# Altium PCB PCB_DuasRodas.PcbDoc
Units mm, origin at the board's own origin, x right, y up, seen from the top; angles counter-clockwise.
Board outline 65 x 65 mm, 2 copper layers (Top Layer, Bottom Layer); 23 components, 35 nets, 133 pads, 6 vias.
Unrouted connection lines stored in the file: 29.
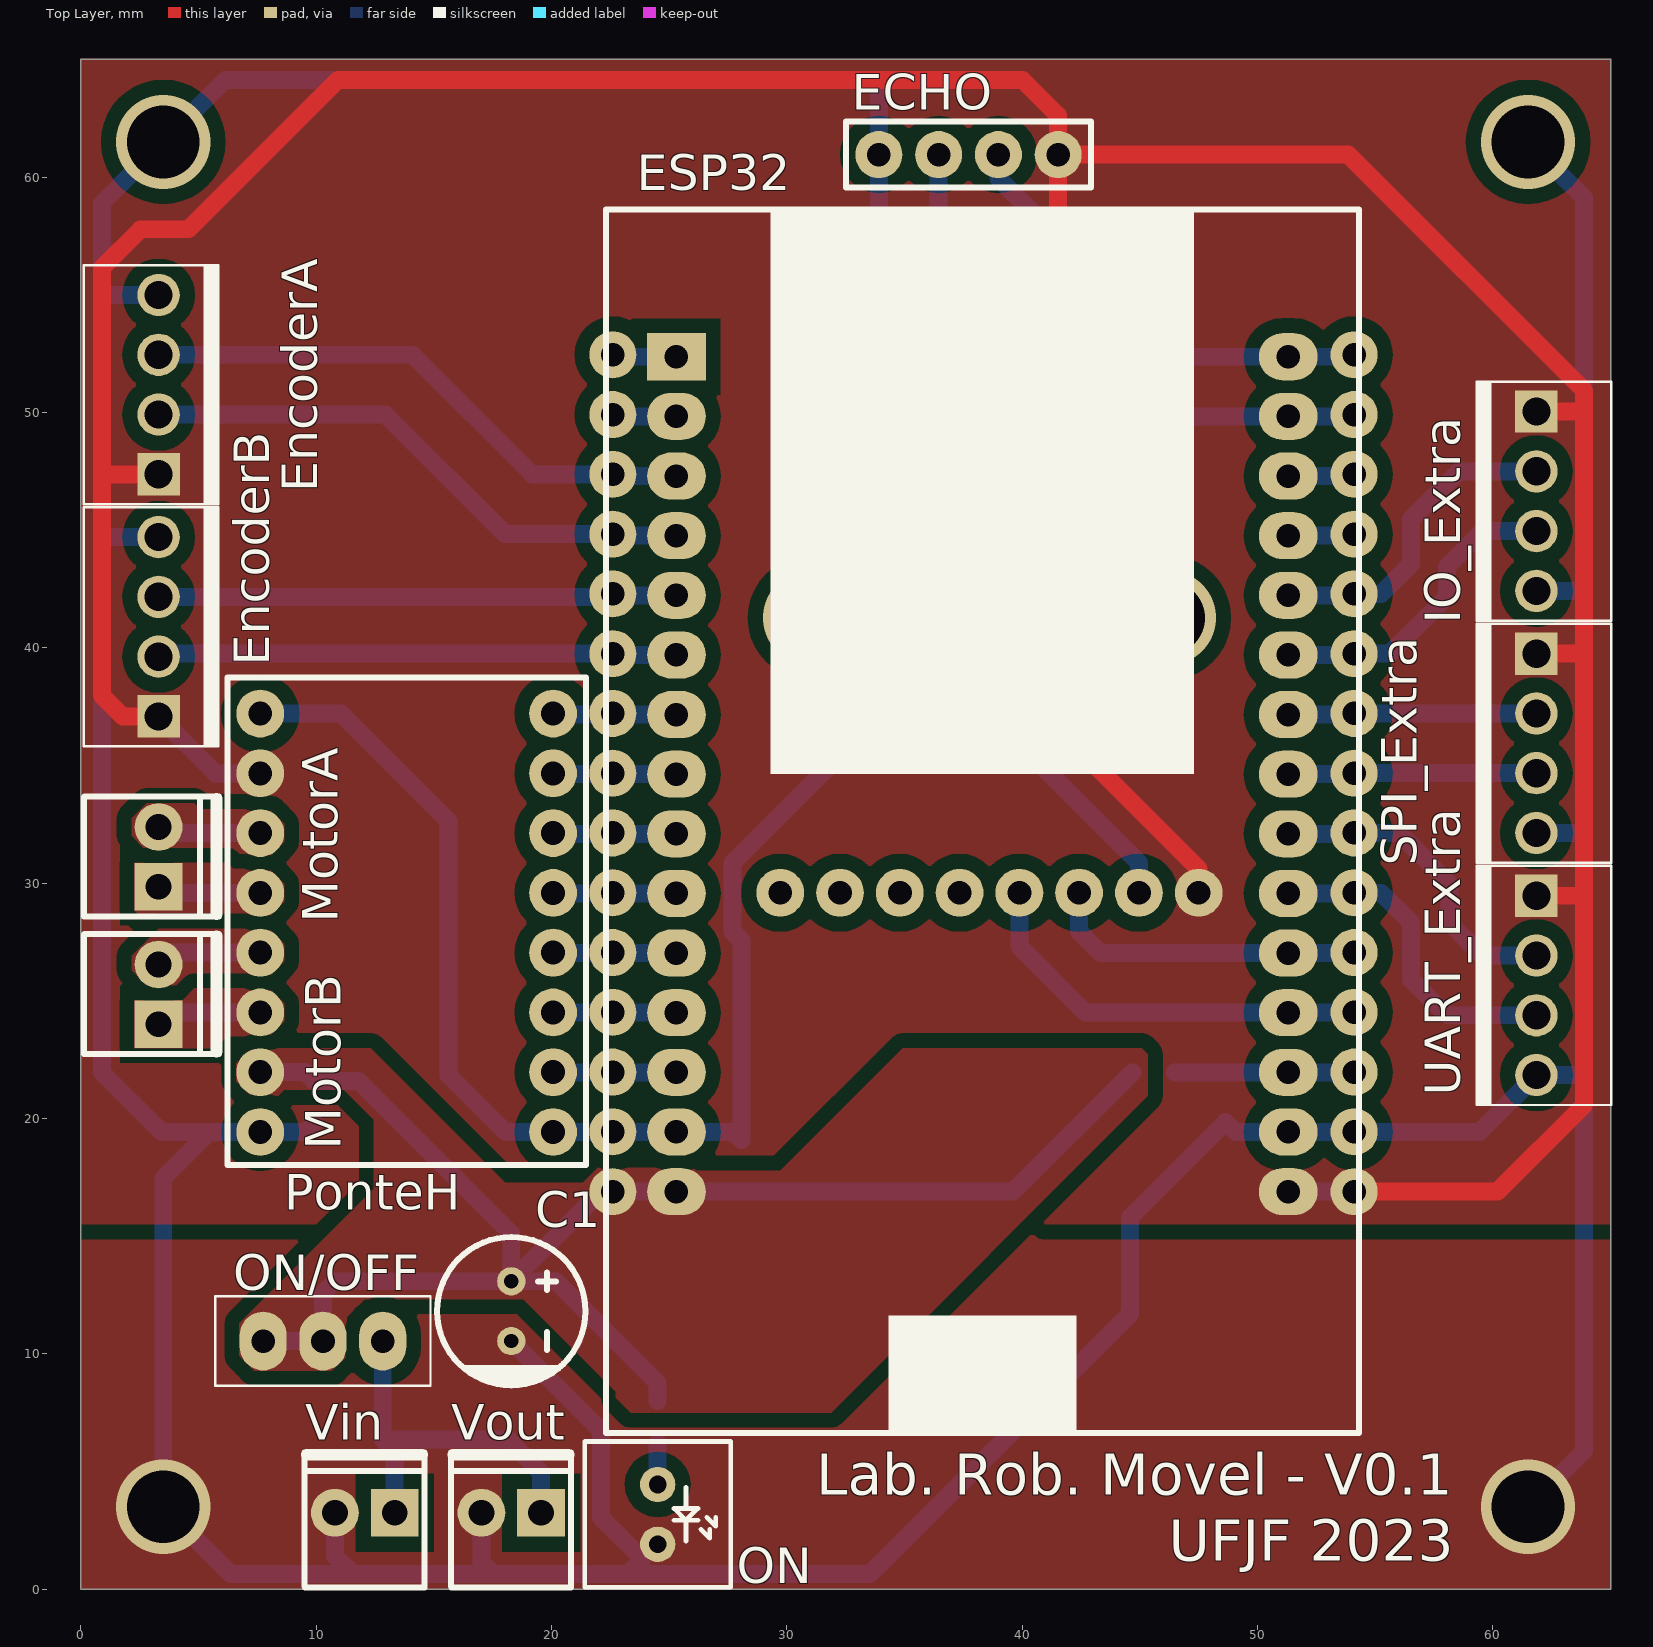
[diagram p0: Top Layer view]
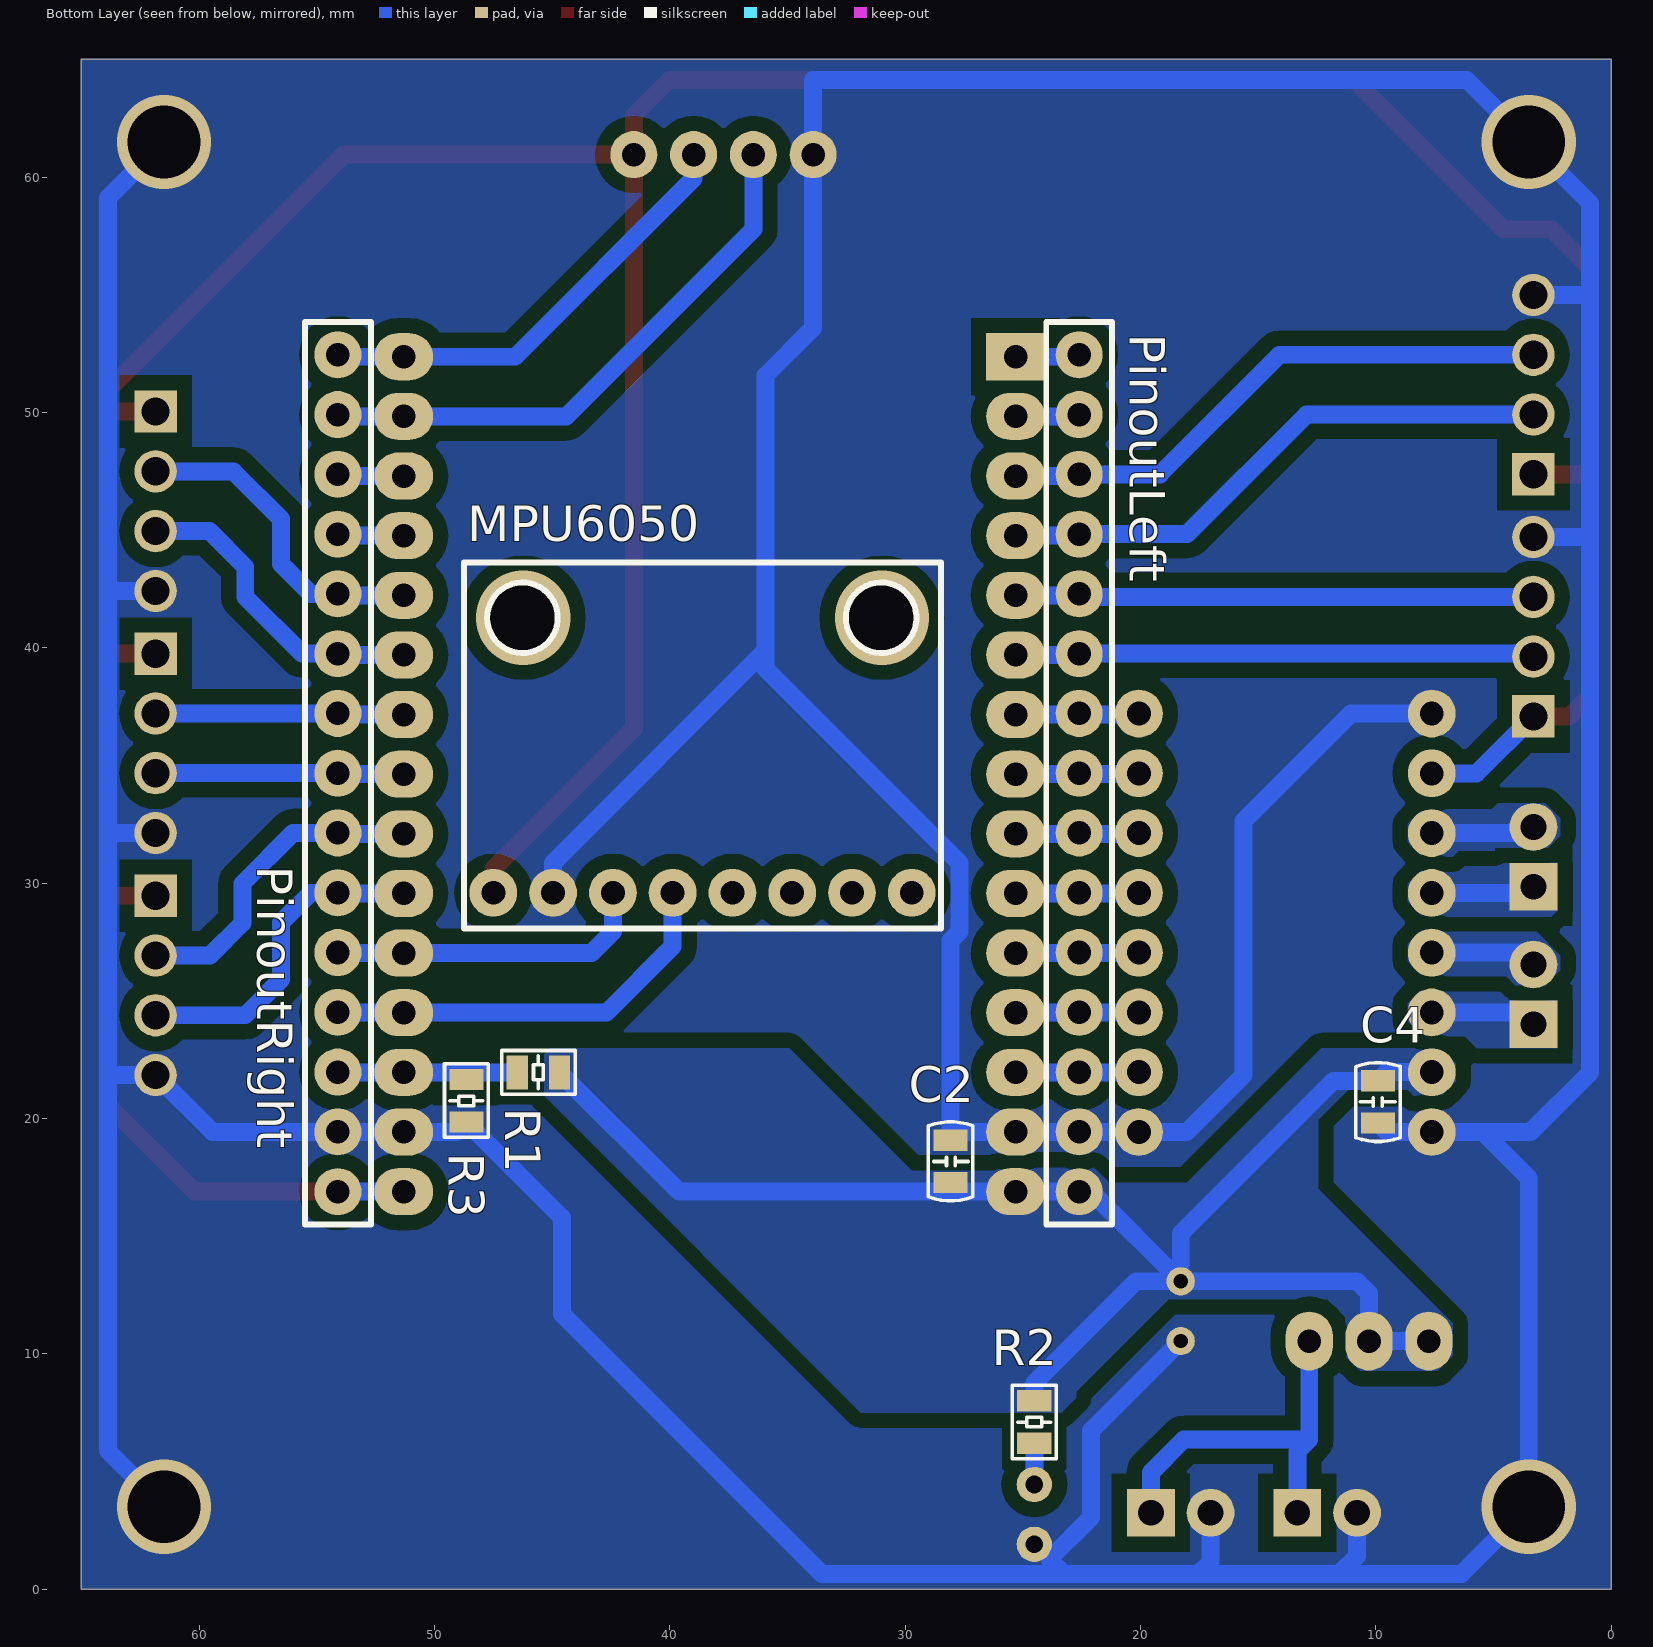
[diagram p1: Bottom Layer view, seen from below]
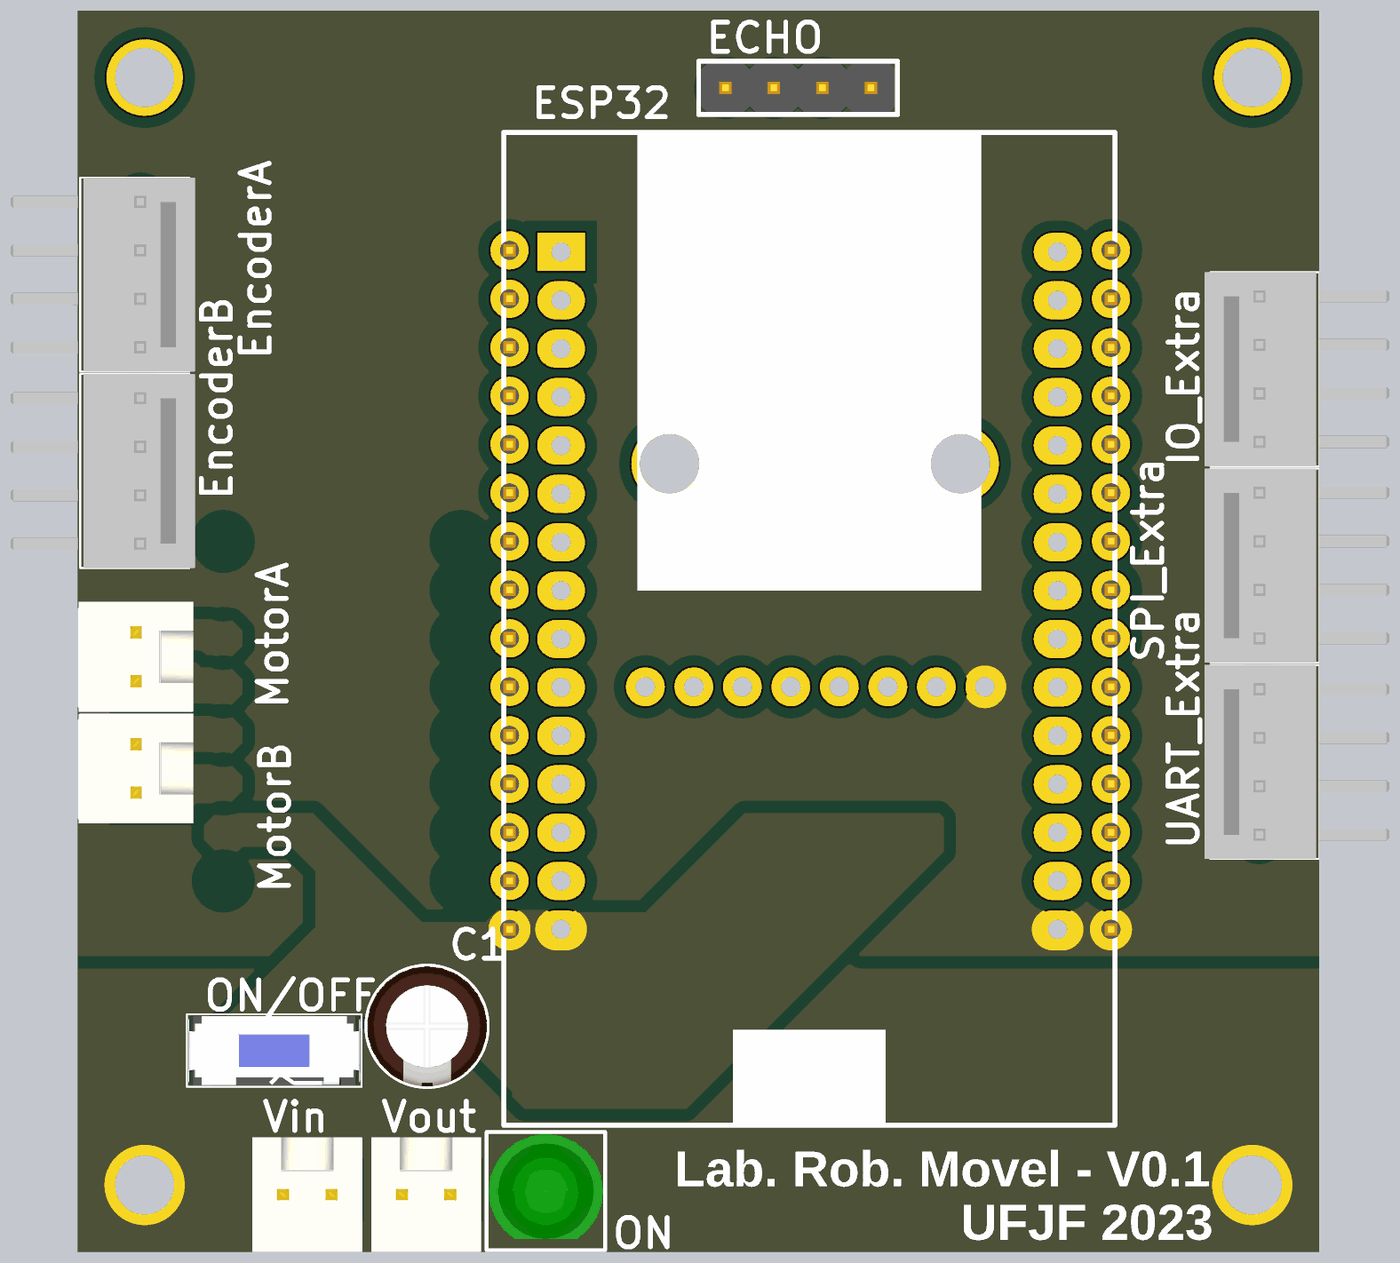
[diagram p2: 3D render of the assembled board from above, using the file's embedded part models]
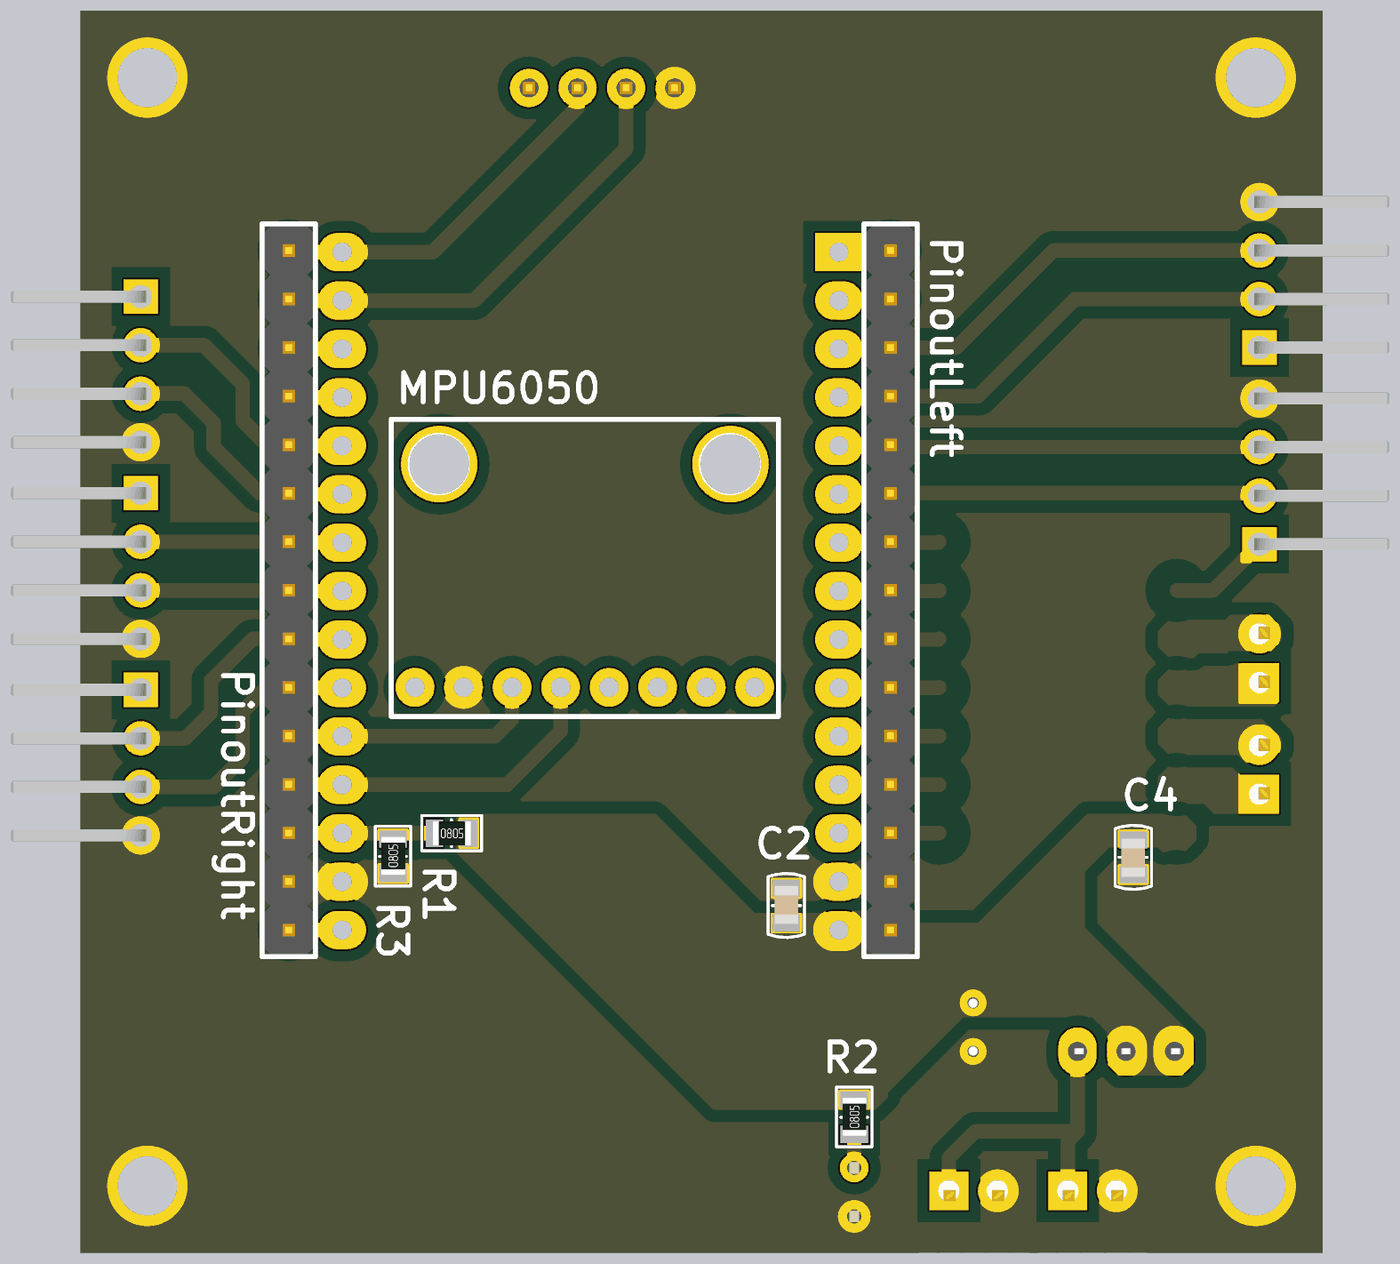
[diagram p3: 3D render of the assembled board from below, using the file's embedded part models]

## Layer stack, top to bottom
Top Solder: solder mask 0.0102, Solder Resist, Dk 3.5
Top Layer: signal copper 0.0356
Dielectric 1: dielectric 0.32, FR-4, Dk 4.8
Bottom Layer: signal copper 0.0356
Bottom Solder: solder mask 0.0102, Solder Resist, Dk 3.5

## Board outline
0,0 65,0 65,65 0,65

## Design rules (kind name [scope] priority, off if disabled: settings)
Clearance [All] p1: gap=0.381 ignorepadtopadclearanceinfootprint=FALSE except(0: Arc-Hole Track-Hole SMDPad-Hole THPad-Hole Via-Hole Fill-Hole Region-Hole Text-Hole; 0.635: Arc-Poly Track-Poly SMDPad-Poly THPad-Poly Via-Poly Fill-Poly Poly-Poly Poly-Region Poly-Text Poly-Hole)
ComponentClearance [All] p1: gap=0 collisioncheckmode=3 verticalgap=0 showdistances=TRUE
HoleSize [All] p1: absolutevalues=TRUE maxlimit=10 minlimit=0.025 maxpercent=80.000 minpercent=20.000
HoleToHoleClearance [All] p1: gap=0.01 allowstackedmicrovias=TRUE
MinimumSolderMaskSliver [All] p1: minsoldermaskwidth=0.01
PolygonConnect [All] p1: connectstyle=Direct reliefconductorwidth=0.762 reliefentries=4 polygonreliefangle="90 Angle" airgapwidth=0.381
RoutingVias [All] p1: holewidth=0.711 width=1.27 viastyle="Through Hole" minholewidth=0.711 minwidth=1.27 maxholewidth=4 maxwidth=5
SilkToSilkClearance [All] p1: silktosilkclearance=0.01
SilkToSolderMaskClearance [IsPad] p1: minsilkscreentomaskgap=0 clearancetoexposedcopper=TRUE
SolderMaskExpansion [All] p1: expansion=0.102
Width [All] p1: maxlimit=2.54 minlimit=0.254 preferedwidth=0.762 minimp=50.000000 maximp=50.000000 favimp=50.000000
24 further rules are at their usual default settings.

## Components (designator, comment, footprint, x,y, rotation, side; value= is the part's Value field where it differs from the comment)
C1 "Cap Elec 100uF/16V" "Cap Elec 100uF/16V" 18.288,11.811 r90 top
C2 "CAP 10uF/16v" "CAP 10uF/16V" 28.067,18.171 r270 bottom
C4 "CAP 10uF/16v" "CAP 10uF/16V" 9.906,20.701 r90 bottom
ECHO "Pin Header" "Pin Header 4 Ways" 41.529,60.96 r180 top
EncoderA "CN_KK_4" CN_KK_4_5045-4 3.302,51.181 r90 top value=?
EncoderB "CN_KK_4" CN_KK_4_5045-4 3.302,40.894 r90 top value=?
ESP32 "ESP32" "DIP30 - duplicate3" 38.308,34.629 r0 top
IO_Extra "CN_KK_4" CN_KK_4_5045-4 61.849,46.228 r270 top value=?
MotorA "KK_2.54_2vias" KK_2VIAS_180º 3.302,29.845 r90 top
MotorB "KK_2.54_2vias" KK_2VIAS_180º 3.302,24.003 r90 top
MPU6050 "Acelerometro" MPU6050 28.478,28.067 r90 bottom
ON "LED Green" "LED GREEN PTH STAND" 24.511,3.175 r270 top
ON/OFF "SS12D00G4" SS12D00G4 14.856,12.4 r180 top (schematic designator On/Off)
PinoutLeft "Pin Header" "Pin Header 15 Ways" 22.606,52.451 r270 bottom
PinoutRight "Pin Header" "Pin Header 15 Ways" 54.102,52.451 r270 bottom
PonteH "Shield Ponte H Pololu" SHIELDMD08AR 994.029,-895.102 r0 top
R1 "RES 0805" "RES SMD 2.2k OHM 1% 1/8W 0805" 47.137,21.034 r180 bottom
R2 "RES 0805" "RES SMD 470OHM 1% 1/8W 0805" 23.586,5.546 r90 bottom
R3 "RES 0805" "RES SMD 270 OHM 1% 1/8W 0805" 47.721,19.196 r90 bottom
SPI_Extra "CN_KK_4" CN_KK_4_5045-4 61.849,35.941 r270 top value=?
UART_Extra "CN_KK_4" CN_KK_4_5045-4 61.849,25.654 r270 top value=?
Vin "KK_2.54_2vias" KK_2VIAS_180º 13.335,3.246 r180 top
Vout "KK_2.54_2vias" KK_2VIAS_180º 19.558,3.246 r180 top

## Footprints (in the part's own frame and the unit in brackets; to place one, negate y for a bottom-side part, rotate by r counter-clockwise, add the part's x,y. Pads: shape width x height; smd on the part's side, far side on the other; paste and mask are expansions set on the pad)
"CAP 10uF/16V" [mm] "10µF ±10% 16V Ceramic Capacitor X5R 0805 (2012 Metric)"
  rect 0.9x1.45 smd: 1(-0.901,0) 2(0.899,0)
  silkscreen extent -1.68,-0.95 1.67,0.95, body extent -1.03,-0.62 0.97,0.63, height 0.61
"Cap Elec 100uF/16V" [mm] "100µF 16V Aluminum Electrolytic Capacitors Radial"
  round 1.2 hole 0.6: 1(-1.27,0) 2(1.27,0)
  silkscreen extent -3.15,-3.15 3.15,3.15, body extent -3.15,-3.15 3.15,3.15, height 11
CN_KK_4_5045-4 [mm]
  rect 1.8x1.8 hole 1.2: 1(-3.81,0)
  round 1.8 hole 1.2: 2(-1.27,0) 3(1.27,0) 4(3.81,0)
  silkscreen extent -5.08,-2.54 5.08,3.18, body extent -5.08,-2.84 5.08,6.8, height 12.11
"DIP30 - duplicate3" [mm]
  rect 2.5x2 hole 1: 1(-13,17.738)
  oval 2.5x2 hole 1: 2(-13,15.204) 3(-13,12.67) 4(-13,10.136) 5(-13,7.602) 6(-13,5.068) 7(-13,2.534) 8(-13,0) 9(-13,-2.534) 10(-13,-5.068) 11(-13,-7.602) 12(-13,-10.136) 13(-13,-12.67) 14(-13,-15.204) 15(-13,-17.738) 16(13,-17.738) 17(13,-15.204) 18(13,-12.67) 19(13,-10.136) 20(13,-7.602) 21(13,-5.068) 22(13,-2.534) 23(13,0) 24(13,2.534) 25(13,5.068) 26(13,7.602) 27(13,10.136) 28(13,12.67) 29(13,15.204) 30(13,17.738)
  silkscreen extent -16,-28 16,24
KK_2VIAS_180º [mil]
  rect 80x80 hole 43.31: 1(0,0)
  round 80 hole 43.31: 2(100,0)
  silkscreen extent -50,-101 151,125, body extent -61,-108 165,128, height 464
"LED GREEN PTH STAND" [mm] "Green 527nm LED Indication - Discrete 3.2V Radial"
  round 1.5 hole 0.75: A(-1.27,0) K(1.27,0)
  silkscreen extent -3.1,-3.1 3.1,3.1, body extent -3,-3 2.5,3, height 8.96
MPU6050 [mil]
  round 80 hole 40: 1(60,748.82) 2(60,648.82) 3(60,548.82) 4(60,448.82) 5(60,348.82) 6(60,248.82) 7(60,148.82) 8(60,48.82)
  silkscreen extent 0,0 613,798
"Pin Header 4 Ways" [mm] "Connector Header 4 ways PTH 0.100\" (2.54mm)"
  round 2 hole 1: 1(0,0) 2(2.54,0) 3(5.08,0) 4(7.62,0)
  silkscreen extent -1.4,-1.4 9.02,1.4, body extent -1.27,-1.27 8.89,1.27, height 10.11
"Pin Header 15 Ways" [mm] "Connector Header 15 ways PTH 0.100\" (2.54mm)"
  round 2 hole 1: 1(0,0) 2(2.54,0) 3(5.08,0) 4(7.62,0) 5(10.16,0) 6(12.7,0) 7(15.24,0) 8(17.78,0) 9(20.32,0) 10(22.86,0) 11(25.4,0) 12(27.94,0) 13(30.48,0) 14(33.02,0) 15(35.56,0)
  silkscreen extent -1.4,-1.4 36.96,1.4, body extent -1.27,-1.27 36.83,1.27, height 10.11
"RES SMD 2.2k OHM 1% 1/8W 0805" [mm] "2.2k Ohms ±1% 0.125W, 1/8W Chip Resistor 0805 (2012 Metric) Moisture Resistant Thick Film"
  rect 0.9x1.45 smd: 1(0.655,0.925) 2(2.455,0.925)
  silkscreen extent 0,0 3.12,1.85, body extent 0.57,0.29 2.57,1.54, height 0.46
"RES SMD 270 OHM 1% 1/8W 0805" [mm] "270 Ohms ±1% 0.125W, 1/8W Chip Resistor 0805 (2012 Metric) Moisture Resistant Thick Film"
  rect 0.9x1.45 smd: 1(0.655,0.925) 2(2.455,0.925)
  silkscreen extent 0,0 3.12,1.85, body extent 0.57,0.29 2.57,1.54, height 0.46
"RES SMD 470OHM 1% 1/8W 0805" [mm] "470 Ohms ±1% 0.125W, 1/8W Chip Resistor 0805 (2012 Metric) Moisture Resistant Thick Film"
  rect 0.9x1.45 smd: 1(0.655,0.925) 2(2.455,0.925)
  silkscreen extent 0,0 3.12,1.85, body extent 0.57,0.29 2.57,1.54, height 0.46
SHIELDMD08AR [mil]
  round 80 hole 40: 1(-38835,36705) 2(-38835,36605) 3(-38835,36505) 4(-38835,36405) 5(-38835,36305) 6(-38835,36205) 7(-38835,36105) 8(-38835,36005) 9(-38345,36005) 10(-38345,36105) 11(-38345,36205) 12(-38345,36305) 13(-38345,36405) 14(-38345,36505) 15(-38345,36605) 16(-38345,36705)
  silkscreen extent -38890,35950 -38290,36765
SS12D00G4 [mm]
  oval 2x2.5 hole 1: 1(2.029,1.859) 2(4.569,1.859) 3(7.109,1.859)
  silkscreen extent 0,-0.04 9.14,3.76, body extent 0.07,0.06 9.07,3.66, height 5.5

## Part data
C1: "100µF 16V Aluminum Electrolytic Capacitors Radial", Capacitance=100uF, Manufacturer 1=KEMET, Manufacturer 1 PN=ESK107M016AC3AA, Voltage=16V, ComponentLink1Description=Datasheet, ComponentLink1URL=https://content.kemet.com/datasheets/KEM_A4004_ESK.pdf, Digikey PN=399-6601-ND, Mouser PN=80-ESK107M016AC3AA
C2 C4: library part "CAP 10uF/16V", "10µF ±10% 16V Ceramic Capacitor X5R 0805 (2012 Metric)", Capacitance=10uF, Manufacturer 1="Samsung Electro-Mechanics", Manufacturer 1 PN=CL21A106KOQNNWE, Voltage=16V, ComponentLink1Description=Specification, ComponentLink1URL=http://www.samsungsem.com/kr/support/product-search/mlcc/__icsFiles/afieldfile/2018/07/27/CL21A106KOQNNWE.pdf, Digikey PN=1276-2894-1-ND, Mouser PN=710-885012107014
ECHO: library part "Pin Header 4 ways", "Connector Header PTH 0.100\" (2.54mm)", Manufacturer 1="Irwin Inc.", Manufacturer 1 PN=M20-9992046
EncoderA EncoderB IO_Extra SPI_Extra UART_Extra: "KK_4"
MotorA MotorB Vin Vout: "Conector KK 2.54mm 2 vias", Descrição="Conector KK 3 vias com passo 2.54mm", Encapsulamento="PTH - 180º", Modelo="2 vias - 180º", Valor="KK 2 vias 180º"
MPU6050: library part MPU6050
ON: library part "LED Green PTH Stand", "Green 527nm LED Indication - Discrete 3.2V Radial", Manufacturer 1="Wurth Electronics Inc.", Manufacturer 1 PN=151053GS03000, ComponentLink1Description=Datasheet, ComponentLink1URL=https://www.cree.com/led-components/media/documents/C503B-BAS-BAN-BCS-BCN-GAS-GAN-GCS-GCN-1094.pdf, Digikey PN=732-5020-ND, Mouser PN=710-151053GS03000
PinoutLeft PinoutRight: library part "Pin Header 15 ways", "Connector Header PTH 0.100\" (2.54mm)", Manufacturer 1="Irwin Inc.", Manufacturer 1 PN=M20-9992046
PonteH: library part Md08a
R1: library part "RES 2.2k 1% 1/8W", "2.2 kOhms ±1% 0.125W, 1/8W Chip Resistor 0805 (2012 Metric) Moisture Resistant Thick Film", Manufacturer 1=Yageo, Manufacturer 1 PN=RC0805FR-072K2L, Power=1/8W, Resistence=2.2k, ComponentLink1Description=Datasheet, ComponentLink1URL=http://www.yageo.com/documents/recent/PYu-RC_Group_51_RoHS_L_9.pdf, Digikey PN=311-2.20KCRCT-ND, Mouser PN=603-RC0805FR-072K2L
R2: library part "RES 470 1% 1/8W", "470 Ohms ±1% 0.125W, 1/8W Chip Resistor 0805 (2012 Metric) Moisture Resistant Thick Film", Manufacturer 1=Yageo, Manufacturer 1 PN=RC0805FR-07470RL, Power=1/8W, Resistence=470, ComponentLink1Description=Datasheet, ComponentLink1URL=http://www.yageo.com/documents/recent/PYu-RC_Group_51_RoHS_L_9.pdf, Digikey PN=311-10.0KCRCT-ND, Mouser PN=603-RC0805FR-07470RL
R3: library part "RES 270 1% 1/8W", "270Ohms ±1% 0.125W, 1/8W Chip Resistor 0805 (2012 Metric) Moisture Resistant Thick Film", Manufacturer 1=Yageo, Manufacturer 1 PN=RC0805FR-07270RL, Power=1/8W, Resistence=270, ComponentLink1Description=Datasheet, ComponentLink1URL=http://www.yageo.com/documents/recent/PYu-RC_Group_51_RoHS_L_9.pdf, Digikey PN=311-270CRCT-ND, Mouser PN=603-RC0805FR-07270RL

## Via types
v1: diameter 4, hole 3.1, Top Layer to Bottom Layer, 6 vias

## Nets (pads, with @x,y where several pads share a name; then routed paths per layer and width w, separated by ;. In a path a pad name is that pad's centre, name@x,y a point inside that pad or via, vN(x,y) a via of type N, cw(c..) or ccw(c..) an arc to the next point about the centre after c; other vN are vias at no path point)
3v3: ECHO.1 EncoderA.1 EncoderB.1 ESP32.16 IO_Extra.1 MPU6050.1 PinoutRight.15 PonteH.2 SPI_Extra.1 UART_Extra.1 | length 185.9
  Top Layer w0.762: EncoderB.1 1.778,37.084 0.889,37.973 0.889,47.299 ; EncoderA.1 0.961,47.371 0.889,47.299 ; MPU6050.1 47.498,30.607 41.529,36.576 ECHO.1 ; PinoutRight.15 60.198,16.891 63.881,20.574 63.881,29.561 ; UART_Extra.1 63.784,29.464 63.881,29.561 ; SPI_Extra.1 63.754,39.751 63.881,39.624 ; IO_Extra.1 63.881,50.038 ; 0.889,47.299 0.889,56.134 2.54,57.785 4.572,57.785 10.922,64.135 40.005,64.135 41.529,62.611 ECHO.1 ; ECHO.1 53.848,60.96 63.881,50.927 63.881,50.038 ; 63.881,29.561 63.881,39.624 ; 63.881,39.624 63.881,50.038
  Bottom Layer w0.762: EncoderB.1 5.721,34.665 PonteH.2 ; ESP32.16 PinoutRight.15
AIN1: ESP32.9 PinoutLeft.9 PonteH.14 | length 5.3
  Bottom Layer w0.762: PonteH.14 20.096,32.095 ESP32.9
AIN2: ESP32.8 PinoutLeft.8 PonteH.15 | length 5.3
  Bottom Layer w0.762: PonteH.15 20.102,34.629 ESP32.8
AO1: MotorA.2 PonteH.3 | length 4.4
  Bottom Layer w0.762: MotorA.2 3.562,32.125 PonteH.3
AO2: MotorA.1 PonteH.4 | length 4.4
  Bottom Layer w0.762: MotorA.1 3.562,29.585 PonteH.4
BIN1: ESP32.11 PinoutLeft.11 PonteH.12 | length 5.2
  Bottom Layer w0.762: PonteH.12 20.084,27.027 ESP32.11
BIN2: ESP32.12 PinoutLeft.12 PonteH.11 | length 5.2
  Bottom Layer w0.762: PonteH.11 20.078,24.493 ESP32.12
BO1: MotorB.1 PonteH.6 | length 4.5
  Bottom Layer w0.762: MotorB.1 3.804,24.505 PonteH.6
BO2: MotorB.2 PonteH.5 | length 4.5
  Bottom Layer w0.762: MotorB.2 3.804,27.045 PonteH.5
E_A1: EncoderA.3 ESP32.3 PinoutLeft.3 | length 24.1
  Bottom Layer w0.762: EncoderA.3 14.097,52.451 19.177,47.371 PinoutLeft.3 22.678,47.299 ESP32.3
E_A2: EncoderA.2 ESP32.4 PinoutLeft.4 | length 24.1
  Bottom Layer w0.762: EncoderA.2 12.935,49.911 18.015,44.831 PinoutLeft.4 22.672,44.765 ESP32.4
E_B1: EncoderB.3 ESP32.5 PinoutLeft.5 | length 22.1
  Bottom Layer w0.762: EncoderB.3 22.479,42.164 PinoutLeft.5 22.666,42.231 ESP32.5
E_B2: EncoderB.2 ESP32.6 PinoutLeft.6 | length 22.1
  Bottom Layer w0.762: EncoderB.2 3.429,39.751 PinoutLeft.6 22.66,39.697 ESP32.6
Echo: ECHO.3 ESP32.29 PinoutRight.2 | length 24.2
  Bottom Layer w0.762: ECHO.3 36.449,57.785 44.401,49.833 ESP32.29 54.024,49.833 PinoutRight.2
EN: ESP32.1 PinoutLeft.1 | length 2.7
  Bottom Layer w0.762: PinoutLeft.1 22.69,52.367 ESP32.1
GND: C1.1 C2.1 C4.1 ECHO.4 EncoderA.4 EncoderB.4 ESP32.14 ESP32.17 IO_Extra.4 MPU6050.2 ON.K PinoutLeft.14 PinoutRight.14 PonteH.1 PonteH.8 PonteH.9 R3.1 SPI_Extra.4 UART_Extra.4 Vin.2 Vout.2 | length 357.2
  Bottom Layer w0.762: EncoderB.4 0.889,44.704 ; EncoderA.4 1.016,54.991 0.889,55.118 ; PonteH.1 11.055,37.205 15.621,32.639 15.621,21.838 18.034,19.425 PonteH.9 ESP32.14 27.714,19.425 C2.1 28.067,27.559 27.686,27.94 27.686,30.861 35.941,39.116 35.941,51.562 33.909,53.594 ECHO.4 33.909,64.135 6.135,64.135 0.889,58.889 0.889,55.118 ; C4.1 9.531,19.425 PonteH.8 5.455,19.425 ; Vin.2 10.795,1.397 11.557,0.635 ; Vout.2 17.018,1.143 17.526,0.635 ; C1.1 22.098,6.731 22.098,3.048 23.876,1.27 23.241,0.635 ; 35.941,39.878 44.958,30.861 MPU6050.2 ; v1(61.5,3.5) 63.881,5.881 63.881,21.844 ; v1(61.5,61.5) 63.881,59.119 63.881,42.418 ; SPI_Extra.4 63.754,32.131 63.881,32.004 ; IO_Extra.4 63.881,42.418 ; 0.889,44.704 0.889,55.118 ; 0.889,44.704 0.889,21.959 3.423,19.425 5.455,19.425 ; 5.455,19.425 3.5,17.47 v1(3.5,3.5) 6.365,0.635 11.557,0.635 ; 11.557,0.635 17.526,0.635 ; 17.526,0.635 23.241,0.635 ; 23.241,0.635 33.528,0.635 44.577,11.684 44.577,15.783 R3.1 49.073,19.425 ESP32.17 54.096,19.425 PinoutRight.14 59.436,19.431 UART_Extra.4 63.881,21.844 ; 63.881,21.844 63.881,32.004 ; 63.881,32.004 63.881,42.418
  other v1: 3.5,61.5
IO19: ESP32.25 IO_Extra.3 PinoutRight.6 | length 13.5
  Bottom Layer w0.762: ESP32.25 54.048,39.697 PinoutRight.6 55.626,39.751 58.039,42.164 58.039,43.434 59.563,44.958 IO_Extra.3
IO21: ESP32.26 IO_Extra.2 PinoutRight.5 | length 13.8
  Bottom Layer w0.762: ESP32.26 54.042,42.231 PinoutRight.5 55.245,42.291 56.515,43.561 56.515,45.466 58.547,47.498 IO_Extra.2
MISO: ESP32.23 PinoutRight.8 SPI_Extra.3 | length 10.6
  Bottom Layer w0.762: ESP32.23 54.06,34.629 PinoutRight.8 SPI_Extra.3
MOSI: ESP32.24 PinoutRight.7 SPI_Extra.2 | length 10.6
  Bottom Layer w0.762: ESP32.24 54.054,37.163 PinoutRight.7 SPI_Extra.2
NetOn/Off_1: ON/OFF.1 Vin.1 Vout.1 | length 16.5
  Bottom Layer w0.762: ON/OFF.1 12.827,6.35 ; Vin.1 13.335,5.842 12.827,6.35 ; Vout.1 19.558,4.953 18.161,6.35 12.827,6.35
NetON_A: ON.A R2.1 | length 1.8
  Bottom Layer w0.762: ON.A R2.1
PWMA: ESP32.7 PinoutLeft.7 PonteH.16 | length 5.3
  Bottom Layer w0.762: PonteH.16 20.108,37.163 ESP32.7
PWMB: ESP32.13 PinoutLeft.13 PonteH.10 | length 5.2
  Bottom Layer w0.762: PonteH.10 20.072,21.959 ESP32.13
RX0: ESP32.27 PinoutRight.4 | length 2.8
  Bottom Layer w0.762: ESP32.27 54.036,44.765 PinoutRight.4
RX2: ESP32.21 PinoutRight.10 UART_Extra.3 | length 14.1
  Bottom Layer w0.762: ESP32.21 54.072,29.561 PinoutRight.10 55.245,29.591 56.515,28.321 56.515,25.908 58.039,24.384 UART_Extra.3
SCL: ESP32.20 MPU6050.3 PinoutRight.11 | length 13.7
  Bottom Layer w0.762: MPU6050.3 42.418,27.94 43.331,27.027 ESP32.20 54.078,27.027 PinoutRight.11
SDA: ESP32.19 MPU6050.4 PinoutRight.12 | length 17.7
  Bottom Layer w0.762: MPU6050.4 39.878,27.305 42.69,24.493 ESP32.19 54.084,24.493 PinoutRight.12
STBY: ESP32.10 PinoutLeft.10 PonteH.13 | length 5.3
  Bottom Layer w0.762: PonteH.13 20.09,29.561 ESP32.10
Trig: ECHO.2 ESP32.30 PinoutRight.1 | length 19.3
  Bottom Layer w0.762: ECHO.2 38.989,59.944 46.566,52.367 ESP32.30 54.018,52.367 PinoutRight.1
TX0: ESP32.28 PinoutRight.3 | length 2.8
  Bottom Layer w0.762: ESP32.28 54.03,47.299 PinoutRight.3
TX2: ESP32.22 PinoutRight.9 UART_Extra.2 | length 13.7
  Bottom Layer w0.762: ESP32.22 54.066,32.095 PinoutRight.9 56.007,32.131 58.166,29.972 58.166,28.297 59.539,26.924 UART_Extra.2
Vbat: ESP32.18 PinoutRight.13 R1.1 R3.2 | length 7.6
  Bottom Layer w0.762: R1.1 ESP32.18 54.09,21.959 PinoutRight.13
Vin: C1.2 C2.2 C4.2 ESP32.15 ON/OFF.2 ON/OFF.3 PinoutLeft.15 PonteH.7 R1.2 R2.2 | length 67.8
  Bottom Layer w0.762: ON/OFF.3@7.112,10.541 ON/OFF.3 ON/OFF.2 10.287,12.573 10.795,13.081 C1.2 ; PonteH.7 9.541,21.965 C4.2 11.801,21.6 18.288,15.113 C1.2 ; R2.2 24.511,8.763 20.193,13.081 C1.2 ; R1.2 39.614,16.891 ESP32.15 PinoutLeft.15 22.098,16.891 C1.2
Vp: ESP32.2 PinoutLeft.2 | length 2.7
  Bottom Layer w0.762: PinoutLeft.2 22.684,49.833 ESP32.2
pads on no net: MPU6050.5 MPU6050.6 MPU6050.7 MPU6050.8
copper on no net:
  other v1: 30.988,41.275 46.228,41.275

## Polygon pours and split planes (outlines as drawn)
GND on Bottom Layer "GND_L02_P024" (solid, remove dead copper, pour order 24): 0,0 65.024,0 65.024,65.024 0,65.024
Vin on Bottom Layer "VIN_L02_P018" (solid, remove dead copper, pour order 18): 10.668,9.271 11.303,9.906 11.303,11.557 12.065,12.319 18.796,12.319 22.733,8.382 22.733,8.128 23.368,7.493 31.877,7.493 45.339,20.955 45.339,22.733 45.085,22.987 34.925,22.987 29.718,17.78 26.162,17.78 26.035,17.907 21.971,17.907 21.336,17.272 18.034,17.272 12.319,22.987 7.239,22.987 6.604,22.352 6.604,21.59 7.239,20.955 8.382,20.955 8.636,21.209 11.176,21.209 12.446,19.939 12.446,17.018 6.731,11.303 6.731,9.906 7.366,9.271
BO1 on Bottom Layer "BO1_L02_P014" (solid, remove dead copper, pour order 14): 4.826,25.527 4.318,25.019 2.286,25.019 2.286,22.987 5.715,22.987 6.223,23.495 8.001,23.495 8.636,24.13 8.636,24.892 8.001,25.527
BO2 on Bottom Layer "BO2_L02_P012" (solid, remove dead copper, pour order 12): 3.937,25.527 4.445,26.035 8.001,26.035 8.636,26.67 8.636,27.432 8.001,28.067 3.302,28.067 2.159,26.924 2.159,26.289 2.921,25.527
AO2 on Bottom Layer "AO2_L02_P010" (solid, remove dead copper, pour order 10): 2.286,30.861 6.223,30.861 6.477,30.607 8.001,30.607 8.636,29.972 8.636,29.21 8.001,28.575 2.54,28.575 2.286,28.829
AO1 on Bottom Layer "AO1_L02_P008" (solid, remove dead copper, pour order 8): 6.477,31.369 6.731,31.115 8.001,31.115 8.636,31.75 8.636,32.512 8.001,33.147 5.08,33.147 4.826,33.401 2.794,33.401 2.159,32.766 2.159,32.004 2.73,31.432 2.73,31.369
3v3 on Top Layer "3V3_L01_P022" (solid, remove dead copper, pour order 22): 0,15.494 0,65.024 65.024,65.024 65.024,15.494
Vin on Top Layer "VIN_L01_P016" (solid, remove dead copper, pour order 16): 10.668,9.271 11.303,9.906 11.303,11.557 12.065,12.319 18.796,12.319 22.733,8.382 22.733,8.128 23.368,7.493 31.877,7.493 45.339,20.955 45.339,22.733 45.085,22.987 34.925,22.987 29.718,17.78 26.162,17.78 26.035,17.907 21.971,17.907 21.336,17.272 18.034,17.272 12.319,22.987 7.239,22.987 6.604,22.352 6.604,21.59 7.239,20.955 8.382,20.955 8.636,21.209 11.176,21.209 12.446,19.939 12.446,17.018 6.731,11.303 6.731,9.906 7.366,9.271
AO1 on Top Layer "AO1_L01_P006" (solid, remove dead copper, pour order 6): 6.477,31.369 6.731,31.115 8.001,31.115 8.636,31.75 8.636,32.512 8.001,33.147 5.08,33.147 4.826,33.401 2.794,33.401 2.159,32.766 2.159,32.004 2.73,31.432 2.73,31.369
AO2 on Top Layer "AO2_L01_P004" (solid, remove dead copper, pour order 4): 2.286,30.861 6.223,30.861 6.477,30.607 8.001,30.607 8.636,29.972 8.636,29.21 8.001,28.575 2.54,28.575 2.286,28.829
BO2 on Top Layer "BO2_L01_P002" (solid, remove dead copper, pour order 2): 3.937,25.527 4.445,26.035 8.001,26.035 8.636,26.67 8.636,27.432 8.001,28.067 3.302,28.067 2.159,26.924 2.159,26.289 2.921,25.527
BO1 on Top Layer "BO1_L01_P000" (solid, remove dead copper, pour order 0): 4.826,25.527 4.318,25.019 2.286,25.019 2.286,22.987 5.715,22.987 6.223,23.495 8.001,23.495 8.636,24.13 8.636,24.892 8.001,25.527
GND on Top Layer "GND_L01_P026" (solid, remove dead copper, pour order 26): 0,15.494 65.024,15.494 65.024,0 0,0

## Silkscreen, mask and mechanical layers (free items; w line width, h text height)
Top Overlay:
  text "Lab. Rob. Movel - V0.1" at 31.242,3.429 h3
  text "UFJF 2023" at 46.228,0.635 h3
Mechanical 1:
  the board outline again, w0.254